# EAGLE board pnp_fuzz_face_clone_v.0.3 (EAGLE 5.10)
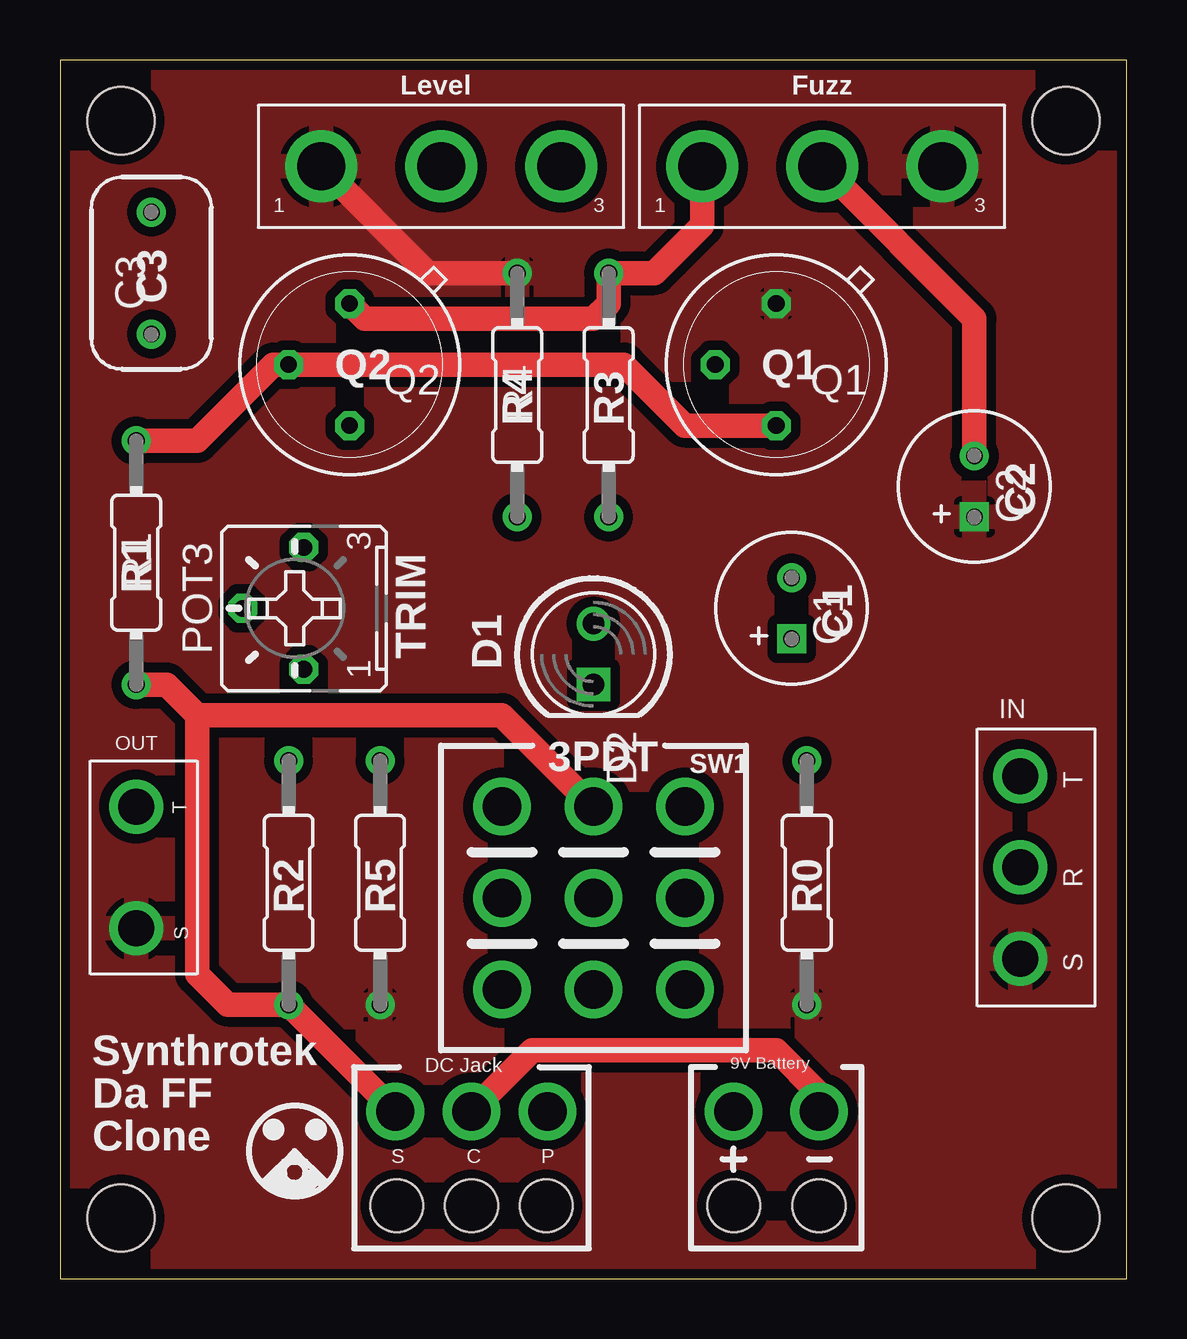
[diagram p0: board, top side]
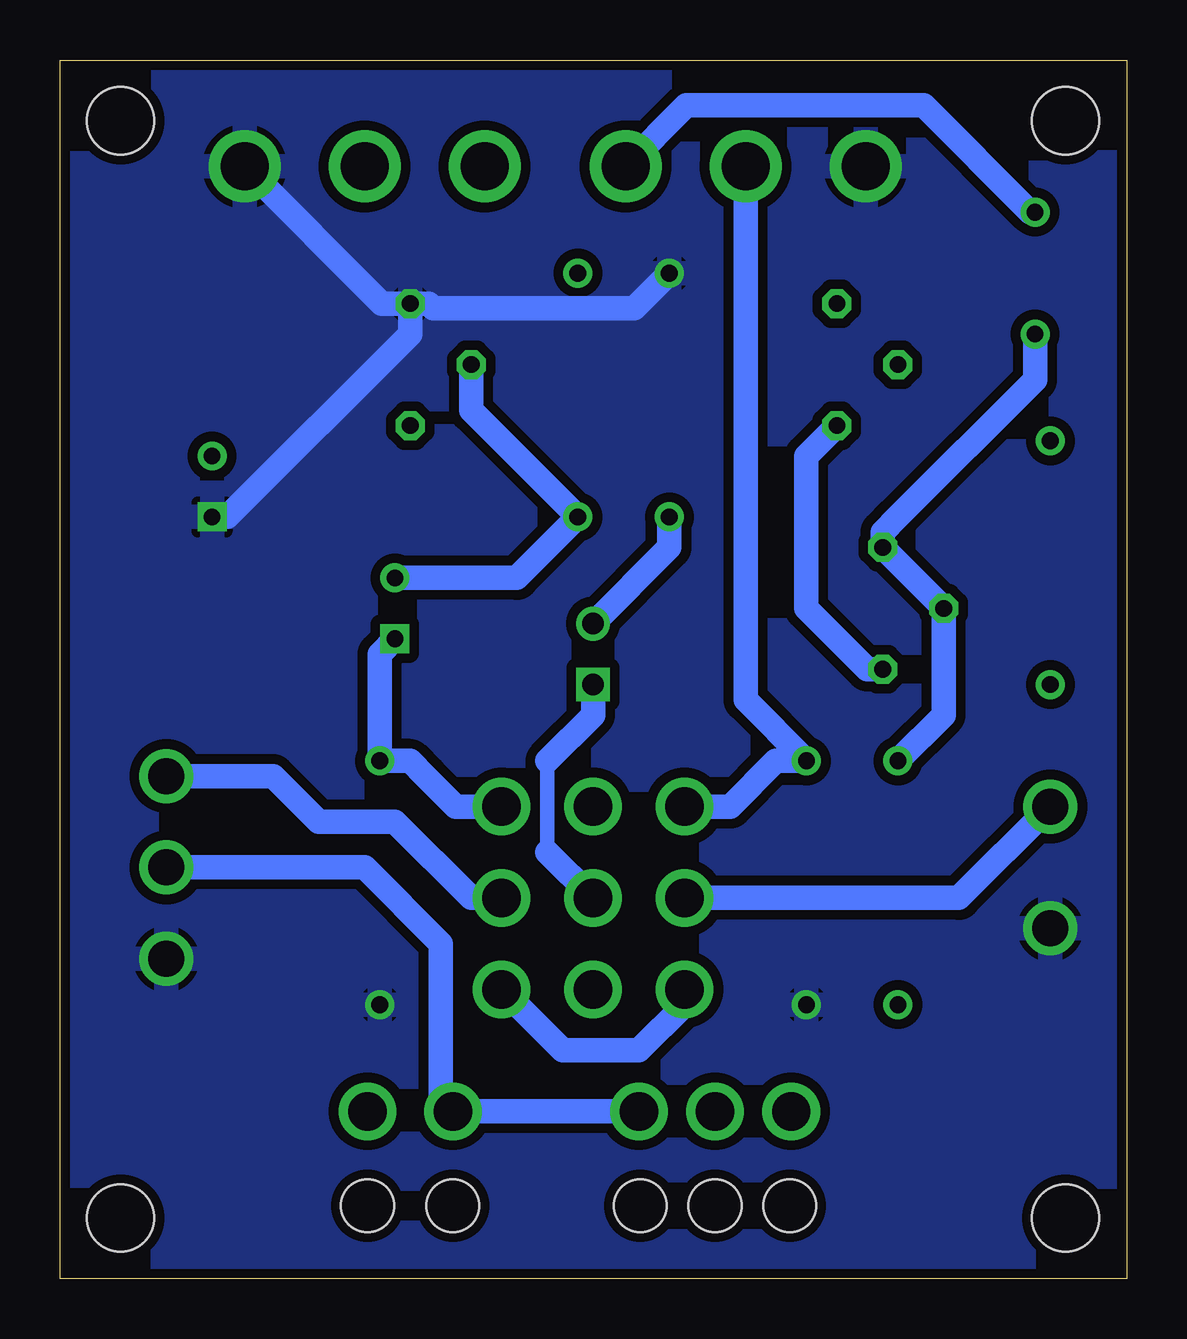
[diagram p1: board, bottom side, seen from below]

Size 44.44 x 50.79 mm. Coordinates in mm from the lower left corner, seen from the top.
Outline: 0,0 44.44,0 44.44,50.79 0,50.79 0,0
Copper layers (1*16): Top 0.035mm / dielectric 1.5mm / Bottom 0.035mm
Design rules "default *": minimum track width 10mil, minimum drill 24mil, track to track 10mil, track to pad 8mil, pad to pad 8mil, via to via 8mil, smd to smd 8mil, copper to edge 10mil, drill to drill 8mil, minimum pad ring 10mil, minimum via ring 8mil, stop-mask expansion 4mil, vias tented up to drill 0mil, thermal gap 10mil
Holes 2.8 mm at 2.54,2.54 41.91,2.54 41.91,48.26 2.54,48.26

## Footprints (pad centres in the part's own frame; a part is rotated, then mirrored left to right if it is on the bottom)
063_025 = drill 0.7 square: + -1.27,0 | drill 0.7 round: - 1.27,0
080X050 = drill 0.7 round: 1 -2.54,0; 2 2.54,0
LED5MM = drill 0.9 round: A -1.27,0 | drill 0.9 square: K 1.27,0
STEREO_JACK = drill 1.5 round: R 0,0; S 3.81,0; T -3.81,0
MONO_JACK = drill 1.5 round: SLEEVE 2.54,0; TIP -2.54,0
POT = drill 2 round: 1 -5,0; 2 0,0; 3 5,0
B25P = drill 0.7 octagon: 1 -2.54,0; 2 0,2.54; 3 2.54,0
TO5 = drill 0.7 octagon: 1 0,-2.54; 2 2.54,0; 3 0,2.54
R0207/4 = drill 0.7 round: 1 -5.08,0; 2 5.08,0
3PDT_SMALL = drill 1.6 round: A1 -3.81,3.81; A2 -3.81,0; A3 -3.81,-3.81; B1 0,3.81; B2 0,0; B3 0,-3.81; C1 3.81,3.81; C2 3.81,0; C3 3.81,-3.81
DC_JACK_OFFBOARD = drill 1.6 round: CONNECT 0,1.27; PIN 3.175,1.27; SLEEVE -3.175,1.27 | hole 2.2: -3.111,-2.667; 0,-2.667; 3.111,-2.667
9V_BATTERY = drill 1.6 round: 9V_BATTERY_+ -1.778,1.27; 9V_BATTERY_- 1.778,1.27 | hole 2.2: -1.778,-2.667; 1.778,-2.667

## Placement (x,y rotation side)
C1  [063_025]  30.48,27.94 90 top
C2  [063_025]  38.1,33.02 90 top
C3  0.01uF  [080X050]  3.81,41.91 90 top
D2  LED5MM  [LED5MM]  22.23,26.04 270 top
IN  STEREO_JACK  [STEREO_JACK]  40.01,17.14 270 top
OUT  MONO_JACK  [MONO_JACK]  3.17,17.14 270 top
POT1  Fuzz  [POT]  31.75,46.35 0 top
POT2  Volume  [POT]  15.88,46.35 0 top
POT3  10K  [B25P]  10.16,27.94 90 top
Q1  2N1305  [TO5]  29.84,38.1 180 top
Q2  2N1305  [TO5]  12.06,38.1 180 top
R0  2M2  [R0207/4]  31.11,16.51 90 top
R1  33K  [R0207/4]  3.17,29.84 270 top
R2  330  [R0207/4]  9.53,16.51 90 top
R3  100K  [R0207/4]  22.86,36.83 90 top
R4  33K  [R0207/4]  19.05,36.83 270 top
R5  2M2  [R0207/4]  13.34,16.51 90 top
SW3  3PDT_SMALL  [3PDT_SMALL]  22.23,15.88 0 top
U$2  DC_JACK_OFFBOARD  [DC_JACK_OFFBOARD]  17.14,5.71 0 top
U$4  9V_BATTERY_CLIP  [9V_BATTERY]  29.84,5.71 0 top

## Library data of the parts
C1 C2 = gm-caps-electro-pol
C3 = gm-caps-film-chicklet
D2 = gm-diodes
IN OUT POT1 POT2 SW3 U$2 U$4 = 00_steve
POT3 = gm-pots
Q1 Q2 = gm-trans
R0 R1-R5 = gm-resistors

## Nets
-9V: R1.2 R2.1 SW3.B1 U$2.SLEEVE
BYPASS: SW3.A3 SW3.C3
C1: C1.- Q1.2 R3.1
DC_CONNECT: U$2.CONNECT U$4.9V_BATTERY_-
GND: C2.+ IN.S OUT.SLEEVE POT1.3 POT2.1 Q1.1 R0.1 R4.1 R5.1
IN: IN.R U$2.PIN U$4.9V_BATTERY_+
N$1: C3.2 POT2.3
N$3: D2.A R4.2
N$4: POT2.2 R5.2 SW3.A1
N$5: D2.K SW3.B2
N$6: OUT.TIP SW3.A2
N$7: IN.T SW3.C2
N$8: POT1.1 Q2.1 R3.2
N$9: Q1.3 Q2.2 R1.1
N$10: POT3.1 Q2.3
N$11: C1.+ R0.2 SW3.C1
N$12: C3.1 POT3.2 POT3.3 R2.2
N$14: C2.- POT1.2

## Tracks (layer width: path | path; a pad name or v marks a point on that pad's centre or on a via)
-9V
  Top 1.016: U$2.SLEEVE R2.1 6.99,11.43 5.71,12.7 5.71,23.5 | R1.2 4.45,24.77 5.71,23.5 | 5.71,23.5 18.41,23.5 SW3.B1
BYPASS
  Bottom 1.016: SW3.A3 18.41,11.43 20.32,9.53 23.5,9.53 SW3.C3
C1
  Bottom 1.016: C1.- 25.4,29.21 R3.1 27.3,36.2 Q1.2
DC_CONNECT
  Top 1.016: U$4.9V_BATTERY_- 31.62,7.75 29.84,9.53 19.68,9.53 U$2.CONNECT
GND
  Top 1.016: R4.1 15.32,41.91 POT2.1
  Bottom 1.016: C2.+ 37.47,31.75 29.84,39.37 Q1.1 | Q1.1 31.04,40.64 POT1.3 | Q1.1 29.08,40.64 28.89,40.45 20.51,40.45 R4.1
  pour Bottom (isolate 0.406): 0,50.8 44.45,50.8 44.45,0 0,0
  pour Top (isolate 0.406): 0,50.8 44.45,50.8 44.45,0 0,0
IN
  Bottom 1.016: U$2.PIN U$4.9V_BATTERY_+ 28.57,7.49 28.57,13.97 31.75,17.14 IN.R
N$1
  Bottom 1.016: C3.2 4,44.45 8.45,48.9 18.34,48.9 POT2.3
N$3
  Bottom 1.016: R4.2 19.05,30.48 D2.A
N$4
  Bottom 1.016: SW3.A1 16.51,19.68 14.61,21.59 R5.2 15.88,24.13 POT2.2
N$5
  Bottom 0.61: 24.13,17.78 24.13,21.59
  Bottom 1.016: D2.K 22.23,23.5 24.13,21.59 | SW3.B2 24.13,17.78
N$6
  Bottom 1.016: SW3.A2 6.99,15.88 OUT.TIP
N$7
  Bottom 1.016: IN.T 35.56,20.95 33.66,19.05 30.48,19.05 27.3,15.88 SW3.C2
N$8
  Top 1.016: POT1.1 26.75,43.9 25.4,42.55 24.77,41.91 R3.2 22.86,40.64 22.23,40.01 12.7,40.01 Q2.1
N$9
  Top 1.016: Q1.3 26.04,35.56 23.5,38.1 Q2.2 8.89,38.1 5.71,34.92 R1.1
N$10
  Bottom 1.016: POT3.1 10.79,25.4 13.34,27.94 13.34,34.29 Q2.3
N$11
  Bottom 1.016: SW3.C1 27.94,19.68 29.21,20.95 29.84,21.59 R0.2 31.11,26.04 C1.+
N$12
  Bottom 1.016: C3.1 3.81,37.47 9.53,31.75 10.16,31.11 POT3.3 POT3.2 7.62,23.5 R2.2
N$14
  Top 1.016: C2.- 38.1,40.01 POT1.2

## Text on the board
tPlace: Level | Fuzz | C3 | Q2 | Q1 | R4 | R3 | C2 | R1 | C1 | TRIM | D1 | SW1 | R2 | R5 | R0 | Synthrotek | Da FF | Clone